# Altium PCB PCB1.PcbDoc
Units mm, origin at the board's own origin, x right, y up, seen from the top; angles counter-clockwise.
Board outline 30 x 20 mm, 2 copper layers (Top Layer, Bottom Layer); 7 components, 7 nets, 68 pads, 0 vias.
Unrouted connection lines stored in the file: 3.
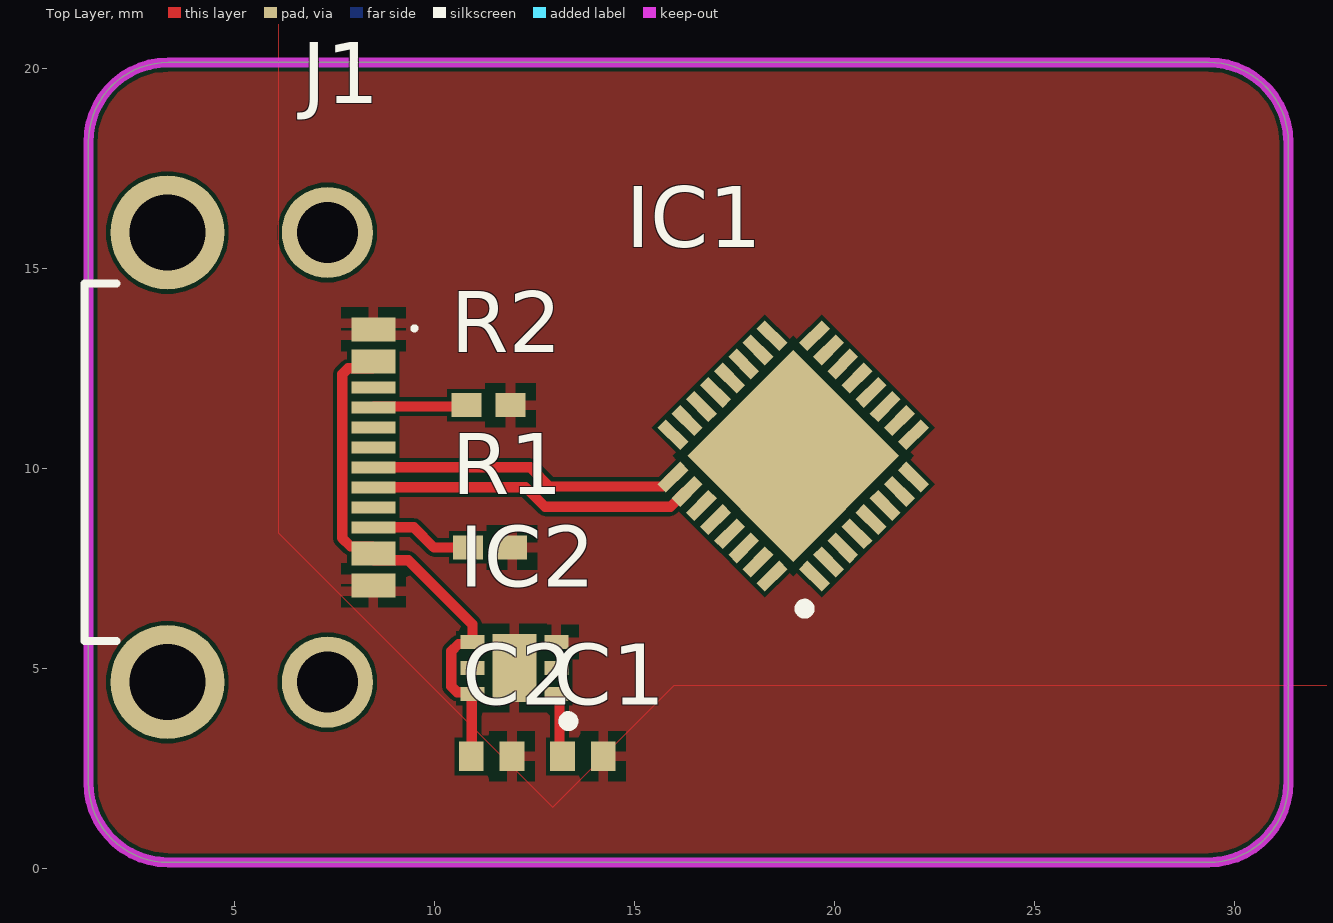
[diagram p0: Top Layer view]
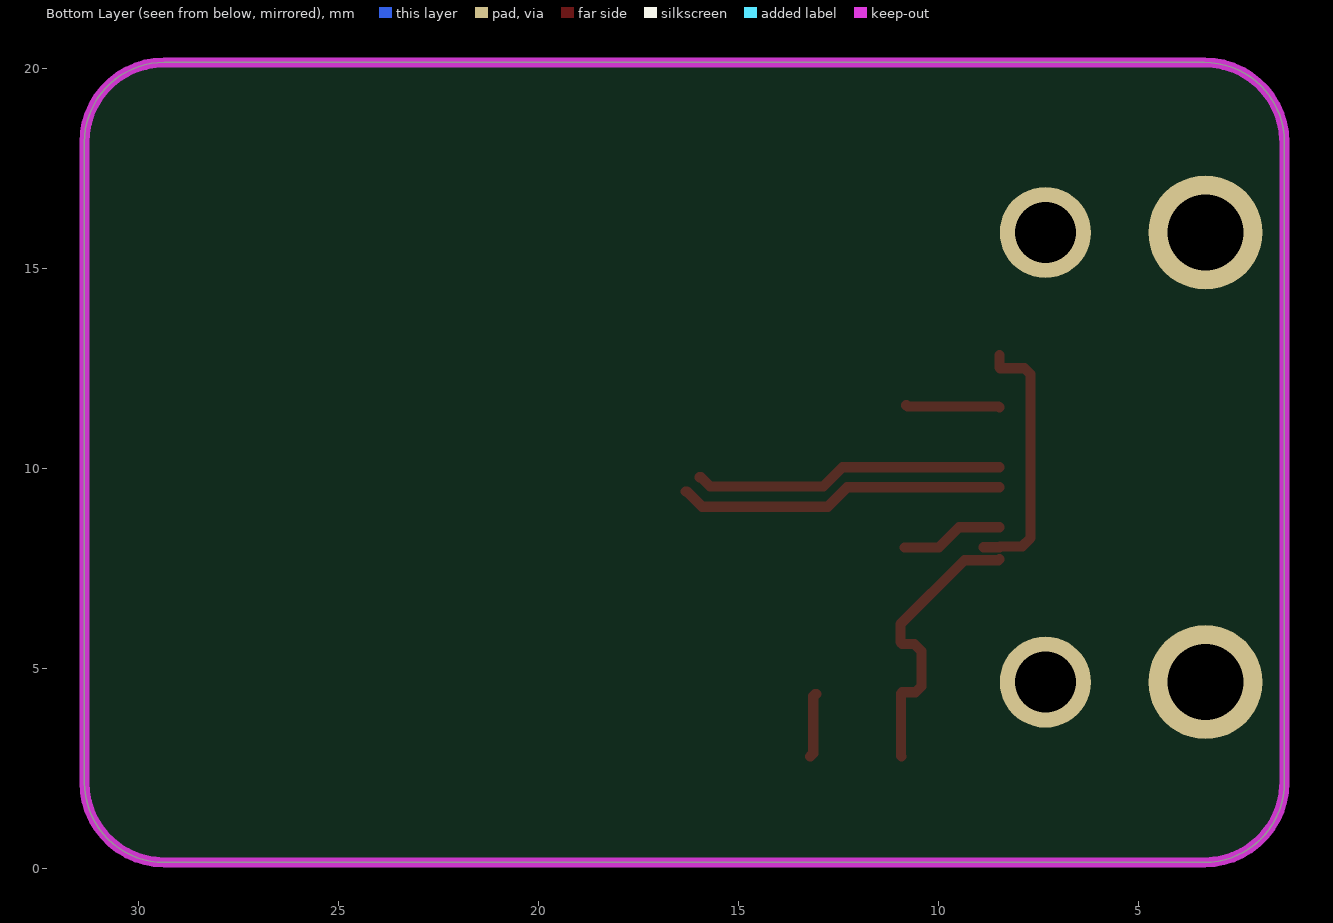
[diagram p1: Bottom Layer view, seen from below]
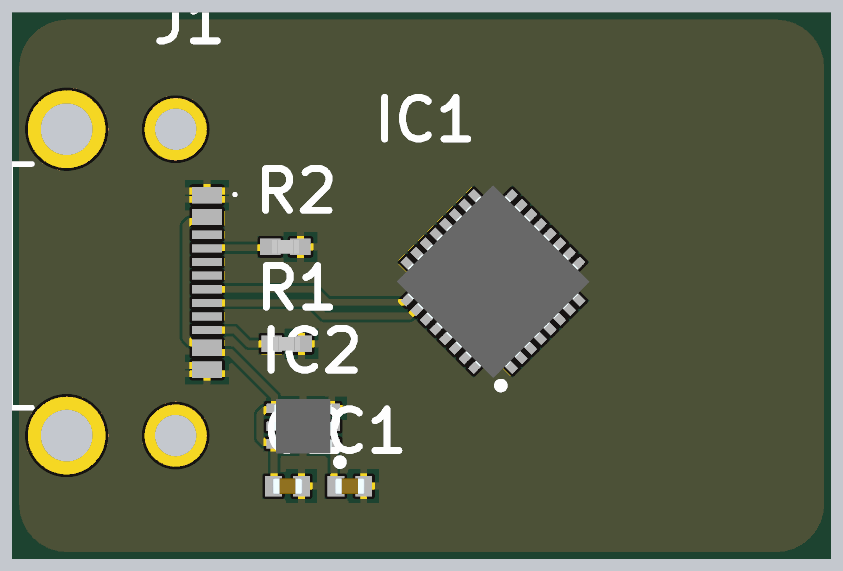
[diagram p2: 3D render of the assembled board from above, using the file's embedded part models]

## Layer stack, top to bottom
Top Solder: solder mask 0.0102, Solder Resist, Dk 3.5
Top Layer: signal copper 0.0356
Dielectric 1: dielectric 0.32, FR-4, Dk 4.8
Bottom Layer: signal copper 0.0356
Bottom Solder: solder mask 0.0102, Solder Resist, Dk 3.5

## Board outline
1.35,2.144 1.35,18.144 cw(c3.35,18.144) 3.35,20.144 29.35,20.144 cw(c29.35,18.144) 31.35,18.144 31.35,2.144 cw(c29.35,2.144) 29.35,0.144 3.35,0.144 cw(c3.35,2.144)

## Design rules (kind name [scope] priority, off if disabled: settings)
Clearance [All] p1: gap=0.1 ignorepadtopadclearanceinfootprint=FALSE
PolygonConnect [All] p1: connectstyle=Relief reliefconductorwidth=0.254 reliefentries=4 polygonreliefangle="90 Angle" airgapwidth=0.254
RoutingVias [All] p1: holewidth=0.711 width=1.27 viastyle="Through Hole" minholewidth=0.711 minwidth=1.27 maxholewidth=0.711 maxwidth=1.27
SolderMaskExpansion [All] p1: expansion=0.102 istentingtop=FALSE
Width [All] p1: maxlimit=0.254 minlimit=0.254 preferedwidth=0.254
30 further rules are at their usual default settings.

## Components (designator, comment, footprint, x,y, rotation, side; value= is the part's Value field where it differs from the comment)
C1 "JMR105CD7105KV-F" CAPC1106X70N 13.714,2.794 r180 top
C2 "JMR105CD7105KV-F" CAPC1106X70N 11.43,2.794 r180 top
IC1 "ESP32-C3FN4" QFN50P500X500X90-33N-D 18.972,10.304 r135 top
IC2 "ADP122ACPZ-3.3-R7" SON65P200X200X60-7N-D 12,5 r180 top
J1 "USB4500-03-1-A" USB4500031A 4.85,10.144 r270 top
R1 "CR0402-FX-5101GLF" RESC1005X40N 11.394,8.018 r180 top
R2 "CR0402-FX-5101GLF" RESC1005X40N 11.352,11.574 r180 top

## Footprints (in the part's own frame and the unit in brackets; to place one, negate y for a bottom-side part, rotate by r counter-clockwise, add the part's x,y. Pads: shape width x height; smd on the part's side, far side on the other; paste and mask are expansions set on the pad)
CAPC1106X70N [mm]
  rect 0.62x0.74 smd: 1(-0.51,0) 2(0.51,0)
  body extent -0.55,-0.3 0.55,0.3, height 0.7
QFN50P500X500X90-33N-D [mm]
  rect 0.8x0.3 smd: 1(-2.5,1.75) 2(-2.5,1.25) 3(-2.5,0.75) 4(-2.5,0.25) 5(-2.5,-0.25) 6(-2.5,-0.75) 7(-2.5,-1.25) 8(-2.5,-1.75) 17(2.5,-1.75) 18(2.5,-1.25) 19(2.5,-0.75) 20(2.5,-0.25) 21(2.5,0.25) 22(2.5,0.75) 23(2.5,1.25) 24(2.5,1.75)
  rect 0.3x0.8 smd: 9(-1.75,-2.5) 10(-1.25,-2.5) 11(-0.75,-2.5) 12(-0.25,-2.5) 13(0.25,-2.5) 14(0.75,-2.5) 15(1.25,-2.5) 16(1.75,-2.5) 25(1.75,2.5) 26(1.25,2.5) 27(0.75,2.5) 28(0.25,2.5) 29(-0.25,2.5) 30(-0.75,2.5) 31(-1.25,2.5) 32(-1.75,2.5)
  rect 3.75x3.75 smd: 33(0,0)
  silkscreen extent -3.02,2.38 -2.78,2.62, body extent -2.55,-2.55 2.55,2.55, height 0.9
RESC1005X40N [mm]
  rect 0.75x0.6 smd: 1(-0.55,0) 2(0.55,0)
  body extent -0.5,-0.25 0.5,0.25, height 0.35
SON65P200X200X60-7N-D [mm]
  rect 0.6x0.35 smd: 1(-1.05,0.65) 2(-1.05,0) 3(-1.05,-0.65) 4(1.05,-0.65) 5(1.05,0) 6(1.05,0.65)
  rect 1.1x1.7 smd: 7(0,0)
  silkscreen extent -1.48,1.2 -1.23,1.45, body extent -1.05,-1 1.05,1, height 0.6
USB4500031A [mm]
  rect 0.3x1.1 smd: A1(-3.477,3.625) A4(-2.677,3.625) A5(-1.377,3.625) A6(-0.377,3.625) A7(0.123,3.625) A8(1.123,3.625) A9(2.423,3.625) A12(3.223,3.625) B1(2.923,3.625) B4(2.123,3.625) B5(1.623,3.625) B6(0.623,3.625) B7(-0.877,3.625) B8(-1.877,3.625) B9(-2.377,3.625) B12(-3.177,3.625)
  round 2.28 hole 1.52: MH1(-5.747,2.475) MH2(5.493,2.475)
  round 2.85 hole 1.9: MH3(-5.747,-1.525) MH4(5.493,-1.525)
  silkscreen extent -4.47,-3.6 4.47,4.7

## Part data
C1 C2: "Capacitor", Manufacturer_Name="TAIYO YUDEN", Mouser Part Number=963-JMR105CD7105KV-F, Datasheet Link=https://ds.yuden.co.jp/TYCOMPAS/or/specSheet?pn=MAASJ105CD7105KFCA01, Height=0.7mm, Manufacturer_Part_Number=JMR105CD7105KV-F, Mouser Price/Stock=https://www.mouser.co.uk/ProductDetail/Taiyo-Yuden/JMR105CD7105KV-F?qs=DPoM0jnrROVuxy8ekm8jxA%3D%3D
IC1: "Integrated Circuit", Manufacturer_Name="Espressif Systems", Mouser Part Number=356-ESP32-C3FN4, Datasheet Link=https://www.mouser.co.uk/datasheet/2/891/esp32_c3_datasheet_en-1989865.pdf, Height=0.9mm, Manufacturer_Part_Number=ESP32-C3FN4, Mouser Price/Stock=https://www.mouser.co.uk/ProductDetail/Espressif-Systems/ESP32-C3FN4?qs=iLbezkQI%252BsjnhgSmJXMnMQ%3D%3D
IC2: "Integrated Circuit", Manufacturer_Name="Analog Devices", Mouser Part Number=584-ADP122ACPZ-3.3R7, Arrow Part Number=ADP122ACPZ-3.3-R7, Arrow Price/Stock=https://www.arrow.com/en/products/adp122acpz-3.3-r7/analog-devices, Datasheet Link=http://www.analog.com/media/en/technical-documentation/data-sheets/ADP122_123.pdf, Height=0.6mm, Manufacturer_Part_Number=ADP122ACPZ-3.3-R7, Mouser Price/Stock=https://www.mouser.co.uk/ProductDetail/Analog-Devices/ADP122ACPZ-33-R7?qs=BpaRKvA4VqFGxcUJVezYbA%3D%3D
J1: "Connector", Manufacturer_Name="GCT (GLOBAL CONNECTOR TECHNOLOGY)", Mouser Part Number=640-USB4500031A, Datasheet Link=https://pl.mouser.com/datasheet/2/837/usb4500-2583670.pdf, Height=3.36mm, Manufacturer_Part_Number=USB4500-03-1-A, Mouser Price/Stock=https://www.mouser.co.uk/ProductDetail/GCT/USB4500-03-1-A?qs=7D1LtPJG0i0Bl4gt1pUZZw%3D%3D
R1 R2: "Resistor", Manufacturer_Name=Bourns, Mouser Part Number=652-CR0402FX-5101GLF, Datasheet Link=https://www.bourns.com/pdfs/CR0402.pdf, Height=0.4mm, Manufacturer_Part_Number=CR0402-FX-5101GLF, Mouser Price/Stock=https://www.mouser.co.uk/ProductDetail/Bourns/CR0402-FX-5101GLF?qs=ePR1ZvdkOKImkuXR%2F%2FtvtA%3D%3D

## Nets (pads, with @x,y where several pads share a name; then routed paths per layer and width w, separated by ;. In a path a pad name is that pad's centre, name@x,y a point inside that pad or via, vN(x,y) a via of type N, cw(c..) or ccw(c..) an arc to the next point about the centre after c; other vN are vias at no path point)
+5: C2.2 IC2.4 IC2.6 J1.A4 J1.A9 J1.B4 J1.B9 | length 13.8
  Top Layer w0.254: J1.A9 8.498,7.698 9.348,7.698 10.95,6.096 IC2.4 10.902,5.602 10.602,5.602 10.423,5.423 10.423,4.547 10.572,4.398 10.902,4.398 10.935,4.365 10.935,2.809 C2.2 ; J1.A4 J1.B9 8.452,12.498 7.847,12.498 7.698,12.349 7.698,8.25 7.904,8.044 8.452,8.044 J1.B4 J1.B4@8.875,8.021
GND: C1.1 C2.1 IC1.33 IC2.3 IC2.7 J1.A1 J1.A12 J1.B1 J1.B12 R1.1 R2.1
NetIC1_25: IC1.25 J1.A7 J1.B7 | length 7.8
  Top Layer w0.254: J1.A7 12.397,10.021 12.876,9.542 15.703,9.542 15.934,9.774 IC1.25
NetIC1_26: IC1.26 J1.A6 J1.B6 | length 8.2
  Top Layer w0.254: J1.B6 12.28,9.521 12.767,9.034 15.902,9.034 16.288,9.42 IC1.26
NetJ1_A5: J1.A5 R2.2 | length 2.3
  Top Layer w0.254: J1.A5 8.498,11.544 10.772,11.544 R2.2
NetJ1_B5: J1.B5 R1.2 | length 2.6
  Top Layer w0.254: J1.B5@8.477,8.523 J1.B5 9.484,8.521 9.987,8.018 R1.2 R1.2@10.842,8.015
VCC: C1.2 IC2.1 | length 1.6
  Top Layer w0.254: IC2.1 13.079,4.35 13.127,4.302 13.127,2.871 C1.2
pads on no net: IC1.1 IC1.2 IC1.3 IC1.4 IC1.5 IC1.6 IC1.7 IC1.8 IC1.9 IC1.10 IC1.11 IC1.12 IC1.13 IC1.14 IC1.15 IC1.16 IC1.17 IC1.18 IC1.19 IC1.20 IC1.21 IC1.22 IC1.23 IC1.24 IC1.27 IC1.28 IC1.29 IC1.30 IC1.31 IC1.32 IC2.2 IC2.5 J1.A8 J1.B8 J1.MH1 J1.MH2 J1.MH3 J1.MH4

## Polygon pours and split planes (outlines as drawn)
GND on Top Layer "GND_L01_P005" (solid, remove dead copper, pour order 5): 0.508,20.574 0,20.066 0,0 34.29,0 32.004,2.286 32.004,20.574
GND on Top Layer "NONET_L01_P000" (solid, remove dead copper, shelved, pour order 0): 6.096,38.862 6.096,8.382 12.954,1.524 16.002,4.572 50.8,4.572 50.8,36.576 51.308,37.084

## Keep-outs
Keep-Out Layer:
  the board outline again, w0.254

## Silkscreen, mask and mechanical layers (free items; w line width, h text height)
Mechanical 1:
  the board outline again, w0.254